# Altium PCB Minna_V01.PcbDoc (part 2 of 2)
Units mil, origin at the board's own origin, x right, y up, seen from the top; angles counter-clockwise.
Board outline 3650 x 2200 mil, 4 copper layers (Top Layer, Power Plane, Ground Plane, Bottom Layer), stack 61.6 mil thick; 103 components, 111 nets, 595 pads, 332 vias.
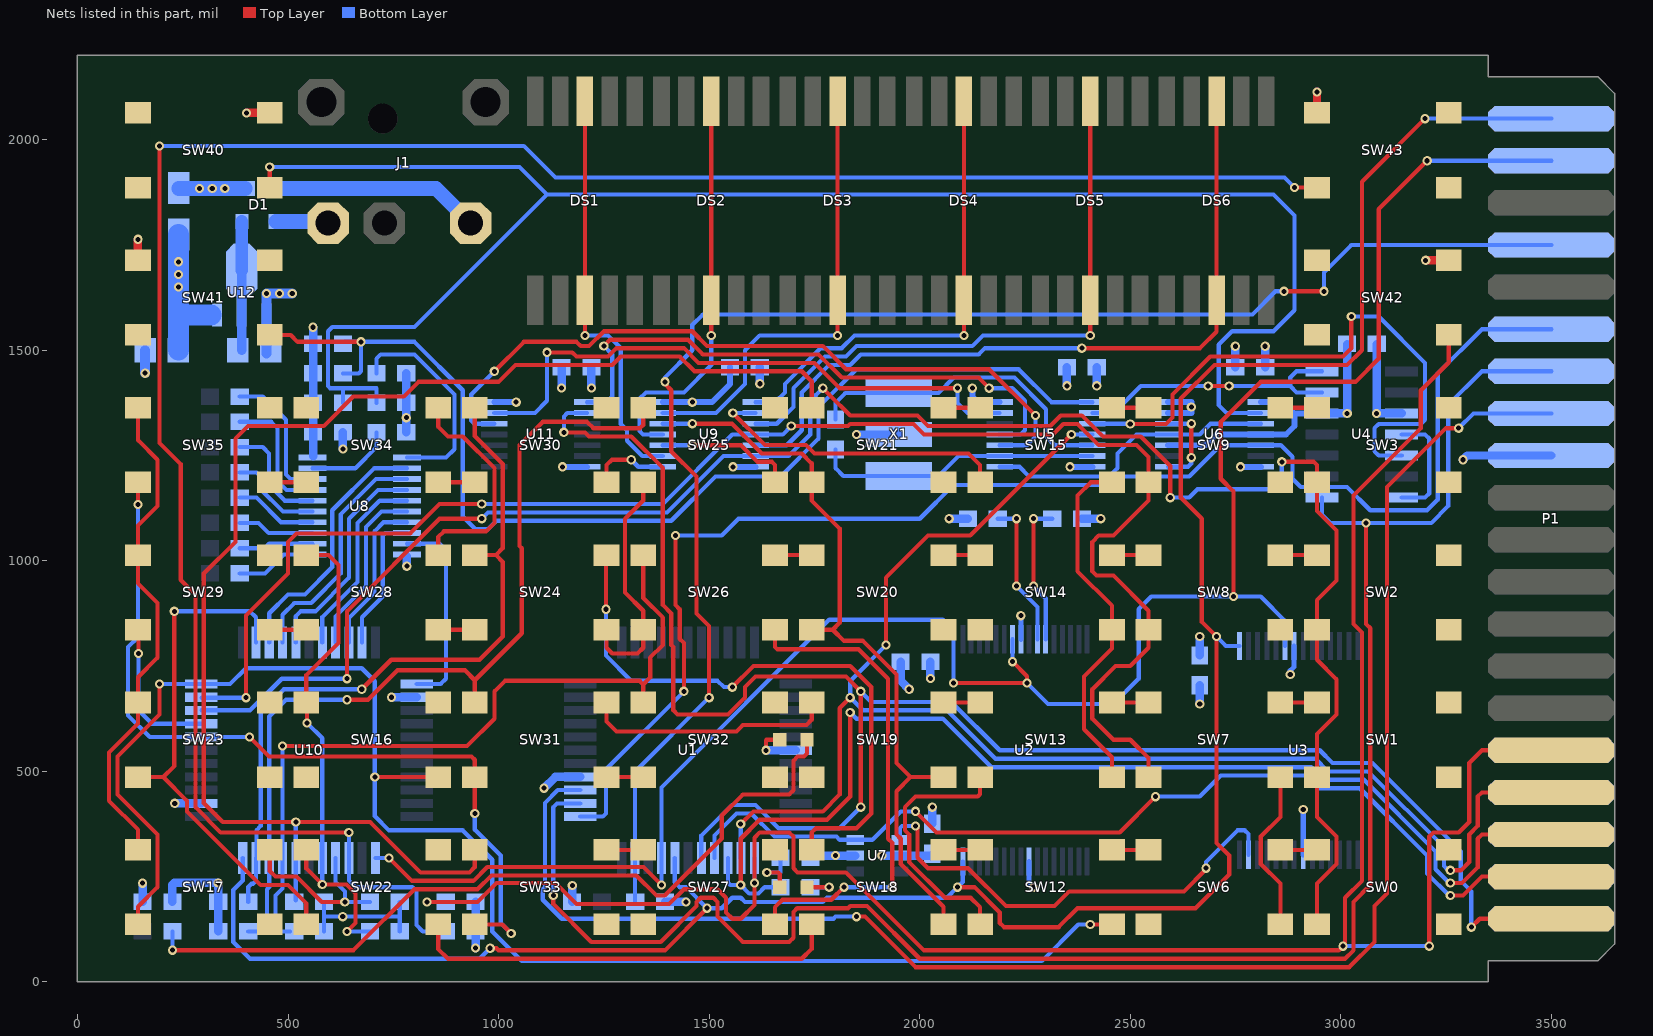
[diagram p4: the nets of this part, all layers, seen from the top]

## Via types
v1: diameter 22, hole 12, Top Layer to Bottom Layer, 332 vias

## Nets (pads, with @x,y where several pads share a name; then routed paths per layer and width w, separated by ;. In a path a pad name is that pad's centre, name@x,y a point inside that pad or via, vN(x,y) a via of type N, cw(c..) or ccw(c..) an arc to the next point about the centre after c; other vN are vias at no path point) (continued)
GND: C1.1 C2.1 C3.1 C4.1 C5.1 C6.1 C7.1 C8.1 C9.1 C10.1 C11.1 C21.1 C22.2 C23.2 C24.2 D1.1 P1.32 R6.1 R7.1 R25.2 R26.2 SW40.1 SW40.2 SW41.1 SW41.2 SW42.1 SW42.2 SW43.1 SW43.2 U1.26 U2.24 U3.21 U4.10 U5.7 U6.7 U7.2 U8.10 U9.7 U10.2 U11.7 U12.1 X1.2 | length 2615.3
  Top Layer w20: SW41.1@143.5,1713.58 v1(143.5,1763.5) ; v1(401.42,2063.58) SW40.2@456.5,2063.58 ; SW43.1@2943.5,2063.58 v1(2943.5,2113.5) ; v1(3201.42,1713.58) SW42.2@3256.5,1713.58
  Bottom Layer w12: U2.24@2259.84,286.22 2259.84,235.16 v1(2270,225) ; U3.21@2910.83,301.97 v1(2910.83,409.17)
  Bottom Layer w14: v1(1151.77,1223.23) U11.7@1210.24,1223.23 ; U9.7@1389.76,1376.77 v1(1460,1376.77) 1506.77,1376.77 1549.57,1419.57 C9.1@1549.57,1460 ; v1(2356.77,1223.23) U5.7@2410.24,1223.23 ; v1(2761.77,1223.23) U6.7@2810.24,1223.23
  Bottom Layer w20: C10.1@154.57,190 v1(154.57,234.57) ; v1(230.98,424.02) U10.2@294.09,424.02 ; v1(630.43,1265.43) C8.1@630.43,1305 ; R26.2@780.87,1305 C21.1@780.87,1375 R25.2@780.87,1445 ; v1(782.2,987.2) U8.10@782.2,1011 ; v1(1108,460) 1135.01,487.01 U1.26@1194.09,487.01 ; v1(1220.43,1410.43) C11.1@1220.43,1460 ; C1.1@1745.43,300 v1(1800,300) U7.2@1846.85,300 ; v1(1850,1300) X1.2@1950,1300 ; C2.1@1954.57,760 1954.57,715.43 v1(1975,695) ; C7.1@2030,375.43 v1(2030,415) ; v1(2070,1100) R7.1@2114.57,1100 ; R6.1@2385.43,1100 v1(2430,1100) ; v1(2420.43,1415.43) C5.1@2420.43,1460 ; v1(2665,660) C3.1@2665,704.57 ; C6.1@2749.57,1460 v1(2749.57,1509.57) ; C4.1@3085,1514.57 v1(3085,1350) U4.10@3144.49,1350 ; v1(3290,1240) 3300,1250 P1.32@3500,1250
  Bottom Layer w23.5: v1(160.63,1445.63) C23.2@160.63,1500 ; C22.2@449.05,1492.13 U12.1@449.05,1583.7 v1(449.05,1635) v1(480,1635) v1(510,1635)
  Bottom Layer w35: C24.2@240.75,1884.37 v1(290,1884.37) v1(320,1884.37) v1(350,1884.37) D1.1@398.5,1884.37
  other v1: 780.87,1340
H\A\L\T\: P1.18 R2.2 U1.14 | length 2757
  Top Layer w10: v1(1575,230) 1575,340 1620,385 1780,385 1835,440 v1(1835,640) ; v1(3260,235) 3288,235 3325,272 3325,340 3335,350 P1.18@3500,350
  Bottom Layer w10: U1.14@1544.49,294.09 1544.49,235.51 1550,230 v1(1575,230) 1595,210 1617,210 1632,225 R2.2@1669.57,225 ; v1(1835,640) 1850,625 2055,625 2170,510 2930,510 2960,480 3055,480 3225,310 3225,267.47 3257.47,235 v1(3260,235)
I\N\T\: P1.16 R9.1 SW42.3 SW42.4 U1.12 | length 5218.8
  Top Layer w10: v1(830,190) 950,190 995,235 1135,235 1185,185 1405,185 1440,220 1520,220 1540,200 1540,165 1555,150 1575,150 1607.48,182.48 v1(1607.48,235) 1607.48,342.48 1620,355 1690,355 1700,345 1700,270 1710,260 1825,260 2010,75 2995,75 v1(3005,85) 3010,90 3010,200 3050,240 3050,830 3030,850 3030,1155 3190,1315 3190,1405 3256.5,1471.5 SW42.4@3256.5,1536.42 ; v1(3210,85) 3210,345 3220,355 3280,355 3305,380 3305,520 3335,550 P1.16@3500,550
  Bottom Layer w10: v1(830,190) R9.1@874.57,190 ; v1(1607.48,235) U1.12@1607.48,294.09 ; v1(3005,85) v1(3210,85)
I\O\R\Q\: P1.20 U1.16 U11.2 | length 4219.2
  Top Layer w10: v1(1155,1305) 1205,1305 1215,1295 1315,1295 1390,1220 1390,895 1410,875 1410,800 1415,795 1415,645 1425,635 1545,635 1585,675 1585,700 1610,725 1825,725 v1(1860,690) v1(1860,415) ; v1(3310,130) 3330,150 P1.20@3500,150
  Bottom Layer w10: v1(1155,1305) 1155,1343 1163.18,1351.18 U11.2@1210.24,1351.18 ; U1.16@1481.5,294.09 1481.5,347.5 1554,420 1610,420 1665,365 1810,365 v1(1860,415) ; v1(1860,690) 1885,665 2075,665 2190,550 2950,550 2980,520 3075,520 3285,310 3285,240 3310,215 v1(3310,130)
M\1\: P1.34 U1.24 U4.1 | length 4397.9
  Top Layer w10: v1(1130,205) 1130,185 1220,95 1385,95 1470,180 1470,190 1480,200 1510,200 1520,190 1520,155 1580,95 1690,95 1700,105 1700,165.99 1709.01,175 1830,175 1835,180 1875,180 2000,55 3010,55 3030,75 3030,190 3070,230 3070,840 3060,850 v1(3060,1090)
  Bottom Layer w10: v1(1130,205) 1130,415 1139.02,424.02 U1.24@1194.09,424.02 ; U4.1@2955.51,1150 2955.51,1109.49 2975,1090 v1(3060,1090) 3215,1090 3255,1130 3255,1370 3335,1450 P1.34@3500,1450
M\R\E\Q\: P1.19 U1.15 U7.3 | length 2354.6
  Top Layer w10: v1(1990,405) 2040,355 2475,355 v1(2560,440) ; v1(3260,205) 3290,205 3335,250 P1.19@3500,250
  Bottom Layer w10: U1.15@1512.99,294.09 1512.99,347.99 1565,400 1600,400 1655,345 1802.4,345 1810,337.4 U7.3@1846.85,337.4 1887.4,337.4 1955,405 v1(1990,405) ; v1(2560,440) 2665,440 2715,490 2920,490 2950,460 3045,460 3205,300 3205,257.47 3257.47,205 v1(3260,205)
NetC20_1: C20.1 R1.1 SW41.3 SW41.4 U5.1 | length 2703.5
  Top Layer w10: SW41.4@456.5,1536.42 506.42,1536.42 522.84,1520 v1@670,1520
  Bottom Layer w10: R1.1@630.43,1445 668,1445 673,1450 v1(673,1520) ; C20.1@635.43,1520 v1(673,1520) ; U5.1@2410.24,1376.77 2313.23,1376.77 2235,1455 1850,1455 1760,1365 1760,1290 1670,1200 1515,1200 1410,1095 995,1095 975,1075 945,1075 915,1105 915,1405 800,1520 v1(673,1520)
NetC21_2: C21.2 R3.1 SW40.3 SW40.4 U6.2 | length 4191
  Top Layer w10: SW40.4@456.5,1886.42 v1(456.5,1935)
  Bottom Layer w10: v1(456.5,1935) 1050,1935 1115,1870 ; R3.1@630.43,1375 630.43,1409.57 ; C21.2@710,1375 710,1410 600,1410 595,1415 595,1545 605,1555 800,1555 1115,1870 ; U6.2@2810.24,1351.18 2728.82,1351.18 2710,1370 2710,1513 2742,1545 2840,1545 2890,1595 2890,1820 2840,1870 1115,1870
NetC22_1: C22.1 D1.4 U12.2 | length 305.6
  Bottom Layer w23.5: C22.1@390,1500 U12.2@390,1591.57 U12.2@390,1690
  Bottom Layer w30: U12.2@390,1690 D1.4@390,1805.63
NetD1_2: D1.2 J1.2 | length 496.3
  Bottom Layer w35: D1.2@471.5,1884.37 851.26,1884.37 J1.2@933.66,1801.97
NetD1_3: D1.3 J1.1 | length 119.9
  Bottom Layer w35: D1.3@471.5,1805.63 J1.1@591.42,1805.63
NetD2_2: D2.2 R2.1 | length 97.1
  Top Layer w10: D2.2@1732.48,225 v1(1785,225)
  Bottom Layer w10: R2.1@1740.43,225 v1(1785,225)
NetD3_2: D3.2 R27.2 | length 1890.3
  Top Layer w10: v1(225.43,75.43) 655.43,75.43 800,220 950,220 983,253 1327,253 1375,205 1394.53,205 1530,340.47 1530,395 1580,445 1690,445 1700,455 1700,525 1710,535 1725,535 1732.48,542.48 D3.2@1732.48,575
  Bottom Layer w10: v1(225.43,75.43) R27.2@225.43,120
NetDS1_3: DS1.3 DS1.8 U9.2 | length 979.6
  Top Layer w10: v1(1205,1535) DS1.3@1205,1618.78 DS1.8@1205,2091.22
  Bottom Layer w10: v1(1205,1535) 1260,1535 1290,1505 1290,1325 1305,1310 1305,1285 1341.18,1248.82 U9.2@1389.76,1248.82
NetDS2_3: DS2.3 DS2.8 U9.4 | length 964.4
  Top Layer w10: v1(1505,1535) DS2.3@1505,1618.78 DS2.8@1505,2091.22
  Bottom Layer w10: U9.4@1389.76,1300 1343,1300 1335,1308 1335,1385 1350,1400 1440,1400 1505,1465 v1(1505,1535)
NetDS3_3: DS3.3 DS3.8 U9.6 | length 1094.5
  Top Layer w10: v1(1805,1535) DS3.3@1805,1618.78 DS3.8@1805,2091.22
  Bottom Layer w10: U9.6@1389.76,1351.18 1516.18,1351.18 1585,1420 1585,1500 1620,1535 v1(1805,1535)
NetDS4_3: DS4.3 DS4.8 U9.8 | length 1128.2
  Top Layer w10: v1(2105,1535) DS4.3@2105,1618.78 DS4.8@2105,2091.22
  Bottom Layer w10: U9.8@1610.24,1376.77 1656.77,1376.77 1680,1400 1680,1420 1765,1505 1815,1505 1845,1535 v1(2105,1535)
NetDS5_3: DS5.3 DS5.8 U9.10 | length 1464.1
  Top Layer w10: v1(2405,1535) DS5.3@2405,1618.78 DS5.8@2405,2091.22
  Bottom Layer w10: U9.10@1610.24,1325.59 1660.59,1325.59 1700,1365 1700,1410 1775,1485 1825,1485 1850,1510 2125,1510 2150,1535 v1(2405,1535)
NetDS6_3: DS6.3 DS6.8 U9.12 | length 1806.3
  Top Layer w10: v1(2385,1505) 2665.96,1505 2705,1544.04 DS6.3@2705,1618.78 DS6.8@2705,2091.22
  Bottom Layer w10: U9.12@1610.24,1274.41 1684.41,1274.41 1720,1310 1720,1400 1785,1465 1835,1465 1860,1490 2140,1490 2155,1505 v1(2385,1505)
NetR6_2: R6.2 U2.11 | length 342.9
  Top Layer w10: v1(2270,940) v1(2270,1100)
  Bottom Layer w10: v1(2270,940) 2299.21,910.79 U2.11@2299.21,813.78 ; v1(2270,1100) R6.2@2314.57,1100
NetR7_2: R7.2 U2.10 | length 351.3
  Top Layer w10: v1(2230,940) v1(2230,1100)
  Bottom Layer w10: R7.2@2185.43,1100 v1(2230,1100) ; v1(2230,940) 2279.53,890.47 U2.10@2279.53,813.78
NetR8_1: R8.1 U5.5 X1.3 | length 779.2
  Bottom Layer w10: R8.1@1800,1335.43 1800,1375 1823.43,1398.43 X1.3@1950,1398.43 2044.43,1398.43 2081,1435 2225,1435 2300,1360 2300,1295 2320.59,1274.41 U5.5@2410.24,1274.41
NetR8_2: R8.2 U5.6 U5.9 X1.1 | length 682
  Bottom Layer w10: R8.2@1800,1264.57 1800,1220 1818.43,1201.57 X1.1@1950,1201.57 2044.57,1201.57 2091.82,1248.82 U5.9@2189.76,1248.82 U5.6@2410.24,1248.82
NetR11_1: R11.1 U8.18 | length 329.7
  Bottom Layer w10: R11.1@385.43,1390 440,1390 495,1335 495,1205 506.02,1193.98 U8.18@557.8,1193.98
NetR12_1: R12.1 U8.17 | length 312.5
  Bottom Layer w10: R12.1@385.43,1330 460,1330 475,1315 475,1190 496.61,1168.39 U8.17@557.8,1168.39
NetR13_1: R13.1 U8.16 | length 269
  Bottom Layer w10: R13.1@385.43,1270 440,1270 455,1255 455,1180 492.2,1142.8 U8.16@557.8,1142.8
NetR14_1: R14.1 U8.15 | length 228.4
  Bottom Layer w10: R14.1@385.43,1210 425,1210 435,1200 435,1170 487.8,1117.2 U8.15@557.8,1117.2
NetR15_1: R15.1 U8.14 | length 196.5
  Bottom Layer w10: R15.1@385.43,1150 425,1150 483.39,1091.61 U8.14@557.8,1091.61
NetR16_1: R16.1 U8.13 | length 182.3
  Bottom Layer w10: R16.1@385.43,1090 430,1090 453.98,1066.02 U8.13@557.8,1066.02
NetR17_1: R17.1 U8.12 | length 176.7
  Bottom Layer w10: R17.1@385.43,1030 445,1030 455.43,1040.43 U8.12@557.8,1040.43
NetR18_1: R18.1 U8.11 | length 190.9
  Bottom Layer w10: R18.1@385.43,970 445,970 489.84,1014.84 U8.11@557.8,1014.84
NetR25_1: R25.1 U8.1 | length 514.5
  Bottom Layer w10: R25.1@710,1445 710,1480 720,1490 800,1490 895,1395 895,1265 875.16,1245.16 U8.1@782.2,1245.16
NetR26_1: R26.1 U8.19 | length 208.1
  Bottom Layer w10: U8.19@557.8,1219.57 659.57,1219.57 710,1270 R26.1@710,1305
NetU4_6: U4.6 U4.7 U5.2 | length 679.6
  Top Layer w10: v1(2685,1415) v1(2735,1415)
  Bottom Layer w10: U5.2@2410.24,1351.18 2461.18,1351.18 2525,1415 v1(2685,1415) ; v1(2735,1415) 2880,1415 ; U4.6@2955.51,1400 2895,1400 2880,1415 ; U4.7@2955.51,1450 2895,1450 2880,1435 2880,1415
NetU4_11: U4.11 U4.14 | length 269.3
  Bottom Layer w10: U4.14@3144.49,1150 3200,1150 3210,1160 3210,1290 3200,1300 U4.11@3144.49,1300
NetU4_12: U4.12 U5.3 | length 1404.3
  Top Layer w10: v1(2500,1325) 2585,1325 2600,1340 2600,1395 2690,1485 3005,1485 3025,1505 v1(3025,1580)
  Bottom Layer w10: U5.3@2410.24,1325.59 2499.41,1325.59 v1(2500,1325) ; v1(3025,1580) 3090,1580 3200,1470 3200,1335 3190,1325 3090,1325 3080,1315 3080,1260 3090,1250 U4.12@3144.49,1250
NetU5_8: U5.8 U6.3 U6.11 | length 702.6
  Bottom Layer w10: U5.8@2189.76,1223.23 2236.77,1223.23 2260,1200 2450,1200 2470,1220 2470,1255 2515,1300 U6.11@2589.76,1300 2665,1300 2690.59,1325.59 U6.3@2810.24,1325.59
NetU5_10: U5.10 U11.12 | length 1756.9
  Top Layer w10: v1(990,1450) 1060,1520 1185,1520 1195,1510 1215,1510 1250,1545 1460,1545 1495,1510 1770,1510 1825,1455 2165,1455 v1(2275,1345)
  Bottom Layer w10: U11.12@989.76,1325.59 942.41,1325.59 935,1333 935,1395 v1(990,1450) ; U5.10@2189.76,1274.41 2254.41,1274.41 2275,1295 v1(2275,1345)
NetU5_11: U5.11 U11.1 | length 1394.2
  Top Layer w10: v1(1250,1510) 1265,1525 1450,1525 1485,1490 1760,1490 1815,1435 2140,1435 v1(2165,1410)
  Bottom Layer w10: U11.1@1210.24,1376.77 1256.77,1376.77 1270,1390 1270,1490 v1(1250,1510) ; v1(2165,1410) 2220,1410 2250,1380 2250,1310 2240,1300 U5.11@2189.76,1300
NetU5_13: U5.13 U11.13 | length 1423.6
  Top Layer w10: v1(1115,1495) 1175,1495 1185,1485 1260,1485 1280,1505 1440,1505 1475,1470 1750,1470 1810,1410 v1(2090,1410)
  Bottom Layer w10: U11.13@989.76,1351.18 1086.18,1351.18 1115,1380 v1(1115,1495) ; v1(2090,1410) 2090,1375 2113.82,1351.18 U5.13@2189.76,1351.18
NetU6_8: U6.8 U6.12 | length 208.9
  Top Layer w10: v1(2645,1245) v1(2645,1325.59)
  Bottom Layer w10: U6.8@2589.76,1223.23 2637.23,1223.23 2645,1231 v1(2645,1245) ; U6.12@2590.35,1325.59 U6.12@2589.76,1325.59 v1(2645,1325.59)
NetU8_2: U8.2 U10.14 | length 617.9
  Bottom Layer w10: U10.14@455.51,805.91 455.51,875.51 500,920 540,920 605,985 605,1120 704.57,1219.57 U8.2@782.2,1219.57
NetU8_3: U8.3 U10.15 | length 576.7
  Bottom Layer w10: U10.15@487.01,805.91 487.01,872.01 515,900 555,900 625,970 625,1110 708.98,1193.98 U8.3@782.2,1193.98
NetU8_4: U8.4 U10.16 | length 532.5
  Bottom Layer w10: U10.16@518.5,805.91 518.5,868.5 530,880 565,880 645,960 645,1100 713.39,1168.39 U8.4@782.2,1168.39
NetU8_5: U8.5 U10.18 | length 457.8
  Bottom Layer w10: U10.18@581.5,805.91 581.5,866.5 665,950 665,1090 717.8,1142.8 U8.5@782.2,1142.8
NetU8_6: U8.6 U10.19 | length 416.5
  Bottom Layer w10: U10.19@612.99,805.91 612.99,867.99 685,940 685,1080 722.2,1117.2 U8.6@782.2,1117.2
NetU8_7: U8.7 U10.20 | length 375.3
  Bottom Layer w10: U10.20@644.49,805.91 644.49,864.49 705,925 705,1070 726.61,1091.61 U8.7@782.2,1091.61
NetU8_8: U8.8 U10.21 | length 334.1
  Bottom Layer w10: U10.21@675.98,805.91 675.98,865.98 725,915 725,1060 731.02,1066.02 U8.8@782.2,1066.02
NetU8_9: U8.9 U10.23 | length 478.5
  Bottom Layer w10: U8.9@782.2,1040.43 859.57,1040.43 875,1025 875,720 862.48,707.48 U10.23@805.91,707.48
NMI: P1.17 U1.13 U5.4 | length 3552.4
  Top Layer w10: v1(1575,375) 1605,405 1770,405 1810,445 1810,650 v1(1835,675) ; v1(1920,800) 1920,960 2020,1060 2120,1060 v1(2360,1300) ; v1(3260,265) 3285,265 3305,285 3305,350 3325,370 3325,440 3335,450 P1.17@3500,450
  Bottom Layer w10: U1.13@1575,295.08 v1(1575,375) ; v1(1920,800) 1835,715 v1(1835,675) 1865,645 2065,645 2180,530 2940,530 2970,500 3065,500 3245,320 3245,275 3255,265 v1(3260,265) ; v1(2360,1300) U5.4@2410.24,1300
PA0: R19.1 SW0.1 SW0.2 SW6.1 SW6.2 SW12.1 SW12.2 SW18.1 SW18.2 SW24.1 SW24.2 SW30.1 SW30.2 U10.43 | length 3452.3
  Top Layer w10: v1(675,695) 745,765 955,765 1010,820 1010,997.16 993.58,1013.58 ; SW24.1@943.5,1013.58 993.58,1013.58 ; SW30.1@943.5,1363.58 943.5,1296.5 1010,1230 1010,1030 993.58,1013.58 ; v1(1255,885) 1255,1013.58 SW24.2@1255,1015 ; v1(1555,700) 1605,750 1835,750 1885,700 1885,400 1850,365 1754,365 1743.5,354.5 SW18.1@1743.5,313.58 ; SW18.2@2056.5,313.58 SW12.1@2143.5,313.58 ; SW12.2@2456.5,313.58 SW6.1@2543.5,313.58 ; SW6.2@2856.5,313.58 SW0.1@2943.5,313.58
  Bottom Layer w10: R19.1@405.43,190 405.43,225.43 413,233 417,233 424.02,240.02 U10.43@424.02,294.09 ; U10.43@425,295.08 425,360 435,370 435,640 490,695 v1(675,695) ; v1(1255,885) 1255,775 1315,715 1520,715 1535,700 v1(1555,700)
PA1: R20.1 SW1.1 SW1.2 SW7.1 SW7.2 SW13.1 SW13.2 SW19.1 SW19.2 SW25.1 SW25.2 SW31.1 SW31.2 U10.42 | length 2978
  Top Layer w10: v1(640,670) 690,670 760,740 920,740 943.5,716.5 ; SW31.1@943.5,663.58 943.5,716.5 ; SW31.2@1256.5,663.58 1256.5,618.5 1280,595 1565,595 1580,610 1731,610 1743.5,622.5 SW19.1@1743.5,663.58 ; SW25.1@1343.5,1363.58 1343.5,1322.5 1336,1315 1225,1315 1210,1330 1105,1330 1050,1275 1050,1035 1055,1030 1055,827.99 943.5,716.5 ; SW19.2@2056.5,663.58 SW13.1@2143.5,663.58 ; SW13.2@2456.5,663.58 SW7.1@2543.5,663.58 ; SW7.2@2856.5,663.58 SW1.1@2943.5,663.58
  Bottom Layer w10: R20.1@405.43,120 443,120 450,127 450,220 455.51,225.51 U10.42@455.51,294.09 455.51,630.51 495,670 v1(640,670)
PA2: R21.1 SW2.1 SW2.2 SW8.1 SW8.2 SW14.1 SW14.2 SW20.1 SW20.2 SW26.1 SW26.2 SW32.1 SW32.2 U10.41 | length 2176.4
  Top Layer w10: v1(487.01,560) 925,560 990,625 990,690 1015,715 1335,715 1343.5,706.5 ; SW32.1@1343.5,663.58 1343.5,706.5 ; SW26.1@1343.5,1013.58 1343.5,911.5 1390,865 1390,800 1360,770 1360,722.99 1343.5,706.5 ; SW26.2@1656.5,1013.58 SW20.1@1743.5,1013.58 ; SW20.2@2056.5,1013.58 SW14.1@2143.5,1013.58 ; SW14.2@2456.5,1013.58 SW8.1@2543.5,1013.58 ; SW8.2@2856.5,1013.58 SW2.1@2943.5,1013.58
  Bottom Layer w10: v1(487.01,560) U10.41@487.01,294.09 487.01,222.01 470,205 470,127 477,120 R21.1@504.57,120
PA3: R22.1 SW3.1 SW3.2 SW9.1 SW9.2 SW15.1 SW15.2 SW21.1 SW21.2 SW27.1 SW27.2 SW33.1 SW33.2 U10.40 | length 3724.7
  Top Layer w10: SW33.1@943.5,313.58 943.5,272.5 931,260 815,260 695,380 v1(518.5,380) 345,380 300,425 300,970 375,1045 375,1290 405,1320 585,1320 655,1390 775,1390 810,1425 1000,1425 1040,1465 1270,1465 1290,1485 1430,1485 1465,1450 1720,1450 1743.5,1426.5 SW21.1@1743.5,1363.58 ; SW33.2@1256.5,313.58 SW27.1@1343.5,313.58 ; SW21.2@2056.5,1363.58 SW15.1@2143.5,1363.58 ; SW15.2@2456.5,1363.58 SW9.1@2543.5,1363.58 ; SW9.2@2856.5,1363.58 SW3.1@2943.5,1363.58
  Bottom Layer w10: R22.1@518.5,193.94 U10.40@518.5,294.09 v1(518.5,380)
PA4: R23.1 SW16.1 SW16.2 SW22.1 SW22.2 SW28.1 SW28.2 SW34.1 SW34.2 U10.38 | length 1770.8
  Top Layer w10: SW22.1@543.5,313.58 543.5,269.49 v1(581.5,231.5) ; SW16.1@543.5,663.58 543.5,728.5 620,805 620,990 596.42,1013.58 SW28.1@543.5,1013.58 ; v1(545,615) SW16.1@545,662.09 ; v1@578.5,231.5 v1(581.5,231.5) ; v1(640,120) 660,140 660,210 638.5,231.5 v1(581.5,231.5) ; SW28.2@856.5,1013.58 856.5,1056.5 870,1070 970,1070 990,1090 990,1220 915,1295 880,1295 856.5,1318.5 SW34.2@856.5,1363.58
  Bottom Layer w10: v1(545,615) 581.5,578.5 U10.38@581.5,294.09 v1(581.5,231.5) ; v1(640,120) R23.1@694.57,120
PA5: R24.1 SW17.1 SW17.2 SW23.1 SW23.2 SW29.1 SW29.2 SW35.1 SW35.2 U10.37 | length 1615.6
  Top Layer w10: SW17.1@143.5,313.58 143.5,361.5 75,430 75,545 143.5,613.5 SW23.1@143.5,663.58 143.5,723.5 190,770 190,900 143.5,946.5 SW29.1@143.5,1013.58 143.5,1083.5 190,1130 190,1240 143.5,1286.5 SW35.1@143.5,1363.58 ; SW17.2@456.5,313.58 456.5,263.5 470,250 520,250 580,190 v1(635,190)
  Bottom Layer w10: U10.37@612.99,294.09 612.99,237.01 635,215 v1(635,190) R24.1@694.57,190
PC0: SW0.3 SW0.4 SW1.3 SW1.4 SW2.3 SW2.4 SW3.3 SW3.4 U9.13 U10.9 | length 4556
  Top Layer w10: v1(640,720) 640,880 860,1100 v1(960,1100) ; v1(1770,1410) 1770.16,1410 1786.02,1394.14 1786.02,1393.98 1835,1345 1995,1345 2020,1320 2310,1320 2335,1345 2385,1345 2435,1295 2525,1295 2595,1225 v1(2595,1150) ; v1(2860,1235) 2936,1235 2943.5,1227.5 SW3.3@2943.5,1186.42 2943.5,1118.5 2990,1072.01 2990,952.99 2943.5,906.5 SW2.3@2943.5,836.42 2943.5,765 2990,718.5 2990,635 2943.5,588.5 SW1.3@2943.5,486.42 2943.5,391.5 2990,345 2990,280 2943.5,233.5 SW0.3@2943.5,136.42
  Bottom Layer w10: U10.9@294.61,645 410,645 485,720 v1(640,720) ; v1(960,1100) 975,1115 1400,1115 1533.82,1248.82 U9.13@1610.24,1248.82 1688.82,1248.82 1740,1300 1740,1380 v1(1770,1410) ; v1(2595,1150) 2640,1150 2660,1170 2850,1170 2860,1180 v1(2860,1235)
PC1: SW6.3 SW6.4 SW7.3 SW7.4 SW8.3 SW8.4 SW9.3 SW9.4 U9.11 U10.10 | length 4186.7
  Top Layer w10: v1(400,675) 400,870 500,970 500,1045 520,1065 790,1065 860,1135 v1(960,1135) ; v1(1695,1320) 1830,1320 1835,1325 1985,1325 2010,1300 2315.96,1300 2340.96,1325 2375,1325 2425,1275 2515,1275 2543.5,1246.5 SW9.3@2543.5,1186.42 2543.5,1143.5 2460,1060 2425,1060 2410,1045 2410,975 2420,965 2460,965 2543.5,881.5 SW8.3@2543.5,836.42 2543.5,793.5 2500,750 2465,750 2410,695 2410,625 2460,575 2500,575 2543.5,531.5 SW7.3@2543.5,486.42 ; SW6.4@2856.5,136.42 2856.5,233.5 2810,280 2810,345 2856.5,391.5 SW7.4@2856.5,486.42
  Bottom Layer w10: U10.10@295.08,675 v1(400,675) ; v1(960,1135) 1390,1135 1555,1300 U9.11@1610.24,1300 1675,1300 v1(1695,1320)
PC2: SW12.3 SW12.4 SW13.3 SW13.4 SW14.3 SW14.4 SW15.3 SW15.4 SW16.3 SW16.4 SW17.3 SW17.4 U9.9 U10.11 | length 5916.4
  Top Layer w10: SW17.3@143.5,136.42 143.5,178.5 190,225 190,350 95,445 95,535 195,635 v1(195,707.48) ; v1(706,486.42) SW16.4@856.5,486.42 ; v1(1556.18,1351.18) 1632.36,1275 1730,1275 1750,1255 2116,1255 2143.5,1227.5 SW15.3@2143.5,1186.42 ; v1@1560,1350 v1@1560,1351.18 ; SW12.3@2143.5,136.42 2143.5,177.5 2121,200 2060,200 1975,285 1975,350 1965,360 1965,415 1990,440 2138,440 2143.5,445.5 SW13.3@2143.5,486.42 ; v1(2405,136.42) SW12.4@2456.5,136.42 ; SW13.4@2456.5,486.42 2456.5,533.5 2390,600 2390,725 2456.5,791.5 SW14.4@2456.5,836.42 2456.5,893.5 2375,975 2375,1155 2406.42,1186.42 SW15.4@2456.5,1186.42
  Bottom Layer w10: v1(195,707.48) U10.11@294.09,707.48 362.48,707.48 400,745 675,745 706,714 v1(706,486.42) 706,394 740,360 915,360 985,290 985,120 1055,50 2290,50 2376.42,136.42 v1(2405,136.42) ; v1(1556.18,1351.18) U9.9@1610.24,1351.18
PC3: SW18.3 SW18.4 SW19.3 SW19.4 SW20.3 SW20.4 SW21.3 SW21.4 SW22.3 SW22.4 SW23.3 SW23.4 U9.5 U10.13 | length 4088.9
  Top Layer w10: SW23.3@143.5,486.42 203.58,486.42 ; v1(230,880) 230,512.84 203.58,486.42 ; SW22.3@543.5,136.42 543.5,186.5 500,230 435,230 260,405 260,430 203.58,486.42 ; SW22.4@856.5,136.42 856.5,78.5 880,55 1720,55 1743.5,78.5 SW18.3@1743.5,136.42 ; v1(1460,1325.59) 1554.41,1325.59 1625,1255 1720,1255 1743.5,1231.5 SW21.3@1743.5,1186.42 1743.5,1143.5 1810,1077.01 1810,852.84 1793.58,836.42 ; SW20.3@1743.5,836.42 1793.58,836.42 ; SW18.4@2056.5,136.42 2056.5,178.5 1955,280 1955,340 1945,350 1945,452.84 1978.58,486.42 ; SW19.4@2056.5,486.42 1978.58,486.42 ; 1793.58,836.42 1820,810 1865,810 1945,730 1945,520 1978.58,486.42
  Bottom Layer w10: v1(230,880) 410,880 424.02,865.98 U10.13@424.02,805.91 ; U9.5@1389.76,1325.59 v1(1460,1325.59)
PC4: SW24.3 SW24.4 SW25.3 SW25.4 SW26.3 SW26.4 SW27.3 SW27.4 SW28.3 SW28.4 SW29.3 SW29.4 U9.3 U10.8 | length 2602.7
  Top Layer w10: v1(145,780) SW29.3@145,834.92 ; SW29.4@456.5,836.42 SW28.3@543.5,836.42 ; SW28.4@856.5,836.42 SW24.3@943.5,836.42 ; SW24.4@1256.5,836.42 1256.5,793.5 1270,780 1330,780 1343.5,793.5 SW26.3@1343.5,836.42 1343.5,881.5 1300,925 1300,1100 1343.5,1143.5 SW25.3@1343.5,1186.42 ; v1(1460,1274.41) 1575.59,1274.41 1615,1235 1649,1235 1656.5,1227.5 SW25.4@1656.5,1186.42 ; SW27.4@1656.5,136.42 1656.5,177.5 1674,195 1790,195 v1(1820,225) ; SW26.4@1656.5,836.42 1656.5,795.5 1662,790 1855,790 1925,720 1925,340 1935,330 v1(1935,225)
  Bottom Layer w10: v1(145,780) 145,645 177.01,612.99 U10.8@294.09,612.99 ; U9.3@1389.76,1274.41 v1(1460,1274.41) ; v1(1820,225) v1(1935,225)
PC5: SW30.3 SW30.4 SW31.3 SW31.4 SW32.3 SW32.4 SW33.3 SW33.4 SW34.3 SW34.4 SW35.3 SW35.4 U9.1 U10.7 | length 2421.6
  Top Layer w10: v1(143.5,1133.5) SW35.3@143.5,1186.42 ; v1(408.5,581.5) 455,535 936,535 943.5,527.5 SW31.3@943.5,486.42 v1(943.5,400) ; SW35.4@456.5,1186.42 SW34.3@543.5,1186.42 ; SW34.4@856.5,1186.42 SW30.3@943.5,1186.42 ; SW33.3@943.5,136.42 1008.58,136.42 v1(1030,115) ; SW31.4@1256.5,486.42 SW32.3@1343.5,486.42 ; SW30.4@1256.5,1186.42 1256.5,1227.5 1269,1240 v1(1315,1240)
  Bottom Layer w10: v1(143.5,1133.5) 143.5,818.5 120,795 120,632.99 171.5,581.5 U10.7@294.09,581.5 v1(408.5,581.5) ; v1(943.5,400) 943.5,361.5 1005,300 1005,140 v1(1030,115) ; v1(1315,1240) 1331.77,1223.23 U9.1@1389.76,1223.23
R\D\: P1.40 U1.18 U2.32 U3.1 U10.44 | length 5635.3
  Top Layer w10: v1(980,80) 995,80 1000,75 1395,75 v1(1495,175) ; v1(2090,225) 2130,225 2190,165 2190,140 2200,130 2330,130 2375,175 2655,175 2735,255 2735,300 2705,330 v1(2705,820) 2670,855 2670,1100 2620,1150 2620,1385 2700,1465 3015,1465 3050,1500 3050,1900 v1(3200,2050)
  Bottom Layer w10: U10.44@392.52,294.09 392.52,240.52 370,218 370,95 410,55 955,55 v1(980,80) ; U1.18@1418.5,294.09 1418.5,236.5 1430,225 1445,225 v1(1495,175) 1530,175 1555,200 1575,200 1585,190 1770,190 1780,200 2065,200 v1(2090,225) 2102.36,237.36 U2.32@2102.36,286.22 ; v1(2705,820) 2726.97,798.03 U3.1@2759.25,798.03 ; v1(3200,2050) P1.40@3500,2050
R\F\S\H\: P1.33 U1.25 | length 3954
  Top Layer w10: v1(1850,155) 1870,155 1990,35 3020,35 3080,95 3080,180 3110,210 3110,1175 3250,1315 v1(3280,1315)
  Bottom Layer w10: U1.25@1194.09,455.51 1140.51,455.51 1110,425 1110,225 1105,220 1105,195 1150,150 1795,150 1800,155 v1(1850,155) ; v1(3280,1315) 3315,1350 P1.33@3500,1350
R\S\T\: P1.35 U1.23 U6.5 | length 3426
  Top Layer w10: v1(1420,1060) 1420,895 1430,885 1430,815 1440,805 v1(1440,690)
  Bottom Layer w10: U1.23@1194.09,392.52 1247.52,392.52 1255,400 1255,505 v1(1440,690) ; v1(1420,1060) 1530,1060 1570,1100 2000,1100 2080,1180 2460,1180 2480,1200 2640,1200 2714.41,1274.41 U6.5@2810.24,1274.41 2857.59,1274.41 2885,1247 2885,1195 2905,1175 3015,1175 3070,1120 3205,1120 3230,1145 3230,1445 3335,1550 P1.35@3500,1550
RAMC\E\: U3.27 U7.4 | length 1114.9
  Top Layer w10: v1(1990,370) 1995,365 1995,295 2020,270 2115,270 2205,180 2320,180 2355,215 2627.53,215 2680,267.47 v1(2680,270)
  Bottom Layer w10: U7.4@1953.15,337.4 1953.15,365.15 1958,370 v1(1990,370) ; v1(2680,270) 2680,285 2755,360 2772,360 2780.91,351.09 U3.27@2780.91,301.97
USER: R10.1 SW43.3 SW43.4 U10.36 | length 5225.2
  Top Layer w10: v1(195,1985) 195,1280 245,1230 245,955 280,920 280,415 340,355 v1(644.49,355) ; v1(2890,1886.42) SW43.3@2943.5,1886.42
  Bottom Layer w10: v1(195,1985) 1060,1985 1135,1910 2866.42,1910 v1(2890,1886.42) ; v1(644.49,355) U10.36@644.49,294.09 644.49,240.51 660,225 795,225 805,215 805,135 820,120 R10.1@874.57,120
VCC: C1.2 C2.2 C3.2 C4.2 C5.2 C6.2 C7.2 C8.2 C9.2 C10.2 C11.2 C20.2 C23.1 C24.1 D2.1 D3.1 R1.2 R3.2 R4.1 R5.1 R9.2 R10.2 R19.2 R20.2 R21.2 R22.2 R23.2 R24.2 U1.6 U2.8 U3.7 U4.5 U5.14 U6.1 U6.4 U6.10 U6.13 U6.14 U7.5 U8.20 U9.14 U10.24 U11.14 U12.3 | length 3330.5
  Top Layer w10: v1(1635,550) 1635,574 1636,575 D3.1@1667.52,575 ; v1(1637,260) 1664.04,260 1667.52,256.52 D2.1@1667.52,225
  Bottom Layer w10: R21.2@585.43,120 585.43,155 ; R22.2@585.43,190 585.43,155 ; R23.2@765.43,120 765.43,155 ; R24.2@765.43,190 765.43,155 ; v1(1637,260) 1669.57,260 C1.2@1669.57,295 ; 585.43,155 v1(630,155) 765.43,155
  Bottom Layer w12: U2.8@2240.16,813.78 v1(2240.16,869.84) ; v1(2880,730) v1@2880,739 ; v1@2881,740 2889.17,748.17 U3.7@2889.17,798.03
  Bottom Layer w14: U11.14@989.76,1376.77 v1(1041.77,1376.77) ; v1(1556.77,1223.23) U9.14@1610.24,1223.23 ; v1(2125,1410) 2125,1390 2138.23,1376.77 U5.14@2189.76,1376.77 ; U6.10@2589.76,1274.41 2679.41,1274.41 2705,1300 U6.4@2810.24,1300 2870,1300 2890,1320 2890,1350 ; U6.13@2589.76,1351.18 2645,1351.18 v1(2645,1365) 2645,1376.77 U6.14@2589.76,1376.77 ; U6.1@2810.24,1376.77 2863.23,1376.77 2890,1350 ; U4.5@2955.51,1350 2890,1350
  Bottom Layer w20: C10.2@225.43,190 225.43,230.43 230,235 v1(334.57,235) R19.2@334.57,190 R20.2@334.57,120 ; U8.20@559.57,1248.5 C8.2@559.57,1305 R3.2@559.57,1375 R1.2@559.57,1445 C20.2@559.57,1515 v1(559.57,1554.57) ; v1(745.98,675.98) U10.24@805.91,675.98 ; v1(945.43,80.43) R10.2@945.43,120 R9.2@945.43,190 ; v1(1149.57,1410.43) C11.2@1149.57,1460 ; R5.1@1175,190.43 v1(1175,229) ; R4.1@1395.43,190 v1(1445,190) ; v1(1620.43,1420.43) C9.2@1620.43,1460 ; v1(1635,550) U1.6@1705.91,550 ; v1(1910,300) U7.5@1953.15,300 C7.2@2025,300 ; v1(2025.43,720.43) C2.2@2025.43,760 ; v1(2349.57,1415.43) C5.2@2349.57,1460 ; C3.2@2665,775.43 v1(2665,820) ; C6.2@2820.43,1460 v1(2820.43,1509.57) ; U4.5@2955.51,1350 v1(3015,1350) C4.2@3015,1514.57
  Bottom Layer w50: C23.1@240,1500.63 240,1583.7 ; C24.1@240,1774.88 240,1583.7 ; 317,1583.7 240,1583.7
  other v1: 240,1650 240,1680 240,1710
W\A\I\T\: P1.37 R4.2 U1.21 | length 3642.8
  Top Layer w10: v1@1395,1420 1410,1405 1410,1260 1470,1200 1470,875 1500,845 v1(1500,675) ; v1(2865,1640) v1(2960,1640)
  Bottom Layer w10: R4.2@1324.02,190.55 U1.21@1324.02,294.09 1324.02,499.02 v1(1500,675) ; v1@1395,1435 1460,1500 1460,1560 1485,1585 2790,1585 2845,1640 v1(2865,1640) ; v1(2960,1640) 2960,1685 3025,1750 P1.37@3500,1750
  other v1: 1395,1425
W\R\: P1.39 U1.19 U2.7 U3.6 U10.34 | length 4847.7
  Top Layer w10: v1(740,294.09) 794.09,240 940,240 973,273 1344.01,273 v1(1387.01,230) ; v1(2080,710) v1(2255,710) 2255,725.94 v1(2220.47,760.47) ; v1(2745,915) 2745,1165 2715,1195 2715,1330 2810,1425 3035,1425 3090,1480 3090,1835 v1(3205,1950)
  Bottom Layer w10: U10.34@707.48,294.09 v1(740,294.09) ; v1(1387.01,230) U1.19@1387.01,294.09 1387.01,462.01 1785,860 2055,860 2080,835 v1(2080,710) ; v1(2220.47,760.47) U2.7@2220.47,813.78 ; v1(2255,710) 2305,660 2460,660 2520,720 2520,885 2550,915 2810,915 2867.52,857.48 U3.6@2867.52,798.03 ; v1(3205,1950) P1.39@3500,1950
pads on no net: J1.3 J1.4 J1.5 J1.6 P1.11 U1.11 U1.17 U1.33 U1.39 U2.6 U2.9 U4.4 U4.8 U4.9 U4.13 U10.12 U10.17 U10.22 U10.39 U11.6 U11.8

## Polygon pours and split planes (outlines as drawn)
VCC on Power Plane (split plane): 3329.9,2150 3330.29,2146.08 3331.43,2142.31 3333.29,2138.83 3335.79,2135.79 3338.83,2133.29 3342.31,2131.43 3346.08,2130.29 3350,2129.9 3601.68,2129.9 3629.9,2101.68 3629.9,98.32 3601.68,70.1 3350,70.1 3346.08,69.71 3342.31,68.57 3338.83,66.71 3335.79,64.21 3333.29,61.17 3331.43,57.69 3330.29,53.92 3329.9,50 3329.9,20.1 20.1,20.1 20.1,2179.9 3329.9,2179.9
GND on Ground Plane (split plane): 3329.9,2150 3330.29,2146.08 3331.43,2142.31 3333.29,2138.83 3335.79,2135.79 3338.83,2133.29 3342.31,2131.43 3346.08,2130.29 3350,2129.9 3601.68,2129.9 3629.9,2101.68 3629.9,98.32 3601.68,70.1 3350,70.1 3346.08,69.71 3342.31,68.57 3338.83,66.71 3335.79,64.21 3333.29,61.17 3331.43,57.69 3330.29,53.92 3329.9,50 3329.9,20.1 20.1,20.1 20.1,2179.9 3329.9,2179.9

## Other copper
Top Layer:
  text ".Layer_Name" at -3.78,-602.05 h100
  text "Minna V0.1" at 0,-800 h100
Bottom Layer:
  text ".Layer_Name" at -3.78,-602.05 h100
  text "Minna V0.1" at 0,-800 h100
Power Plane (plane layer: these items are gaps in the copper):
  text ".Layer_Name" at -3.78,-602.05 h100
  text "Minna V0.1" at 0,-800 h100
Ground Plane (plane layer: these items are gaps in the copper):
  text ".Layer_Name" at -3.78,-602.05 h100
  text "Minna V0.1" at 0,-800 h100

## Silkscreen, mask and mechanical layers (free items; w line width, h text height)
Top Overlay:
  text ".Layer_Name" at -3.78,-602.05 h100
  text "Minna V0.1" at 0,-800 h100
Bottom Overlay:
  text ".Layer_Name" at -3.78,-602.05 h100
  text "Minna V0.1" at 0,-800 h100
Bottom Paste:
  text ".Layer_Name" at -3.78,-602.05 h100
  text "Minna V0.1" at 0,-800 h100
Top Solder:
  text ".Layer_Name" at 0,-600 h100
  text "Minna V0.1" at 0,-800 h100
Bottom Solder:
  text ".Layer_Name" at 0,-600 h100
  text "Minna V0.1" at 0,-800 h100
Drill Guide:
  text ".Layer_Name" at -3.78,-602.05 h100
  text "Minna V0.1" at 0,-800 h100
Title Block:
  lines w5: -450,-574 -250,-574 ; -450,1298 -250,1298 ; -450,3178 -250,3178 ; 1926,-2450 1926,-2250 ; 1926,4850 1926,5050 ; 4298,-2450 4298,-2250 ; 4298,4850 4298,5050 ; 4350,-1950 8850,-1950 ; 4350,-1650 8850,-1650 ; 4350,-1350 5850,-1350 ; 5850,-2250 5850,-1650 5850,-1050 ; 6675,-2450 6675,-2250 ; 6675,4850 6675,5050 ; 7950,-2250 7950,-1950 ; 8850,-574 9050,-574 ; 8850,1298 9050,1298 ; 8850,3178 9050,3178 ; 4350,-2250 2950,-2250 2950,-1050 4350,-1050 ; 4350,-2250 8850,-2250 ; 4350,-2250 4350,-1050 ; 4350,-1050 5850,-1050 ; 5850,-1050 8850,-1050 8850,-2250 ; 8850,-2250 -250,-2250 -250,4850 8850,4850 8850,-2250 ; -450,-2450 -450,5050 9050,5050 9050,-2450 -450,-2450
  lines w9: 4060,4229.5 8690,4229.5 ; 4060,4390.2 8690,4390.2 ; 4000,2702 ccw(c4052,2702) 4052,2650 8698,2650 ccw(c8698,2702) 8750,2702 8750,4698 ccw(c8698,4698) 8698,4750 4052,4750 ccw(c4052,4698) 4000,4698 4000,2702
  text "1" at 722.34,4915 h70
  text "2" at 3080.35,4915 h70
  text "3" at 5457,4915 h70
  text "4" at 7832.35,4915 h70
  text "Layer Stack Up Detail for: Minna_V01.PcbDoc" at 4060,4490.6 h105
  text "Layer" at 4060,4330.2 h37
  text "Gerber" at 5057.38,4330.2 h37
  text "Copper" at 5549.59,4330.2 h37
  text "Dielectric" at 6102.21,4330.2 h37
  text "Dielectric" at 6680.73,4330.2 h37
  text "Dielectric" at 7418.2,4330.2 h37
  text "Dielectric" at 7996.71,4330.2 h37
  text "Name" at 4060,4256.2 h37
  text "Document" at 5057.38,4256.2 h37
  text "Thickness" at 5549.59,4256.2 h37
  text "Height" at 6102.21,4256.2 h37
  text "Material" at 6680.73,4256.2 h37
  text "Constant" at 7418.2,4256.2 h37
  text "Type" at 7996.71,4256.2 h37
  text "Top Solder Mask" at 4060,4110.42 h52
  text "(.GTS)" at 5057.38,4110.42 h52
  text "0.4mil" at 6102.21,4110.42 h52
  text "Solder Resist" at 6680.73,4110.42 h52
  text "3.50" at 7418.2,4110.42 h52
  text "A" at -375,4025 h70
  text "A" at 8920,4025 h70
  text "Top Layer" at 4060,3881.25 h52
  text "(.GTL)" at 5057.38,3881.25 h52
  text "2.1mil" at 5549.59,3881.25 h52
  text "14mil" at 6102.21,3766.67 h52
  text "FR-4" at 6680.73,3766.67 h52
  text "4.20" at 7418.2,3766.67 h52
  text "Core" at 7996.71,3766.67 h52
  text "Power Plane" at 4060,3652.08 h52
  text "(.GP1)" at 5057.38,3652.08 h52
  text "0.7mil" at 5549.59,3652.08 h52
  text "28mil" at 6102.21,3537.5 h52
  text "FR-4" at 6680.73,3537.5 h52
  text "4.20" at 7418.2,3537.5 h52
  text "PrePreg" at 7996.71,3537.5 h52
  text "Ground Plane" at 4060,3422.92 h52
  text "(.GP2)" at 5057.38,3422.92 h52
  text "0.7mil" at 5549.59,3422.92 h52
  text "14mil" at 6102.21,3308.33 h52
  text "FR-4" at 6680.73,3308.33 h52
  text "4.20" at 7418.2,3308.33 h52
  text "Core" at 7996.71,3308.33 h52
  text "Bottom Layer" at 4060,3193.75 h52
  text "(.GBL)" at 5057.38,3193.75 h52
  text "2.1mil" at 5549.59,3193.75 h52
  text "Bottom Solder Mask" at 4060,2964.58 h52
  text "(.GBS)" at 5057.38,2964.58 h52
  text "0.4mil" at 6102.21,2964.58 h52
  text "Solder Resist" at 6680.73,2964.58 h52
  text "3.50" at 7418.2,2964.58 h52
  text "ALL HOLES INDICATE FINISHED SIZE" at 4008,2508 h60
  text "MATERIAL ->" at 4008,2208 h60
  text "B" at -375,2149 h70
  text "B" at 8920,2149 h70
  text "MATERIAL: EPOXY FIBERGLASS FR4 TG170 OR EQUIVALENT," at 4108,2108 h60
  text "LAMINATE AND PREPREG (B-STAGE) TO BE IN ACCORDANCE WITH IPC-4101/24 OR IPC-4101/26." at 4108,2008 h60
  text "MATERIAL MUST MEET UL 94V-0 FLAMABILITY RATING." at 4108,1908 h60
  text "ACCEPTABILITY REQUIREMENTS PER IPC-A-600E." at 4108,1808 h60
  text "0.062\"" at 6208,1808 h60
  text "+/- 0.007\" FINISHED THICKNESS." at 6508,1808 h60
  text "THIS IS A 4 LAYER BOARD." at 4108,1708 h60
  text "FINISH ->" at 4008,1558 h60
  text "FINISHED COPPER THICKNESS TO BE" at 4108,1408 h60
  text "0.5" at 5658,1408 h60
  text "oz. EXTERNAL LAYERS," at 5808,1408 h60
  text "0.5" at 6808,1408 h60
  text "oz. INTERNAL LAYERS (MULTI-LAYERED)" at 6958,1408 h60
  text "SOLDER MASK OVER BARE COPPER, BOTH SIDES, L.P.I., BLACK IN COLOR. 0.002\" MAX THICKNESS" at 4108,1308 h60
  text "ALL EXPOSED CONDUCTIVE PATTERN AREAS NOT COVERED WITH SOLDERMASK OR OTHER PLATING" at 4108,1208 h60
  text "SHALL BE IMMERSION GOLD FINISH." at 4108,1108 h60
  text "SILKSCREEN SHALL BE WHITE, PERMANENT, ORGANIC, NON-CONDUCTIVE INK." at 4108,1008 h60
  text "THERE SHALL BE NO SILKSCREEN ON ANY SOLDERABLE COMPONENT PAD." at 4108,908 h60
  text "UL LOGO, MANUFACTURER'S IDENTIFICATION AND DATE CODE LETTER SHALL BE RENDERED IN ETCH ON" at 4108,808 h60
  text "THE TOP SIDE OF THE BOARD" at 4108,708 h60
  text "TOLERANCES ->" at 4008,558 h60
  text "WARP OR TWIST OF BOARD SHALL NOT EXCEED 1%." at 4108,408 h60
  text "CONDUCTOR WIDTHS AND SPACING SHALL BE WITHIN +/- 0.001\" OF GERBER DATA." at 4108,308 h60
  text "C" at -375,273 h70
  text "C" at 8920,273 h70
  text "HOLE LOCATION +/- 0.003\". MAXIMUM LAYER TO LAYER MIS-REGISTRAION SHALL BE 0.005\"" at 4108,208 h60
  text "HOLE DIAMETER TOLERANCE IS +/- 0.003\" AFTER PLATING" at 4108,108 h60
  text "REMOVE ALL BURRS AND BREAK SHARP EDGES 0.015\" MAXIMUM." at 4108,8 h60
  text "SURFACE MOUNT PAD PLATING MUST BE FLAT TO A MAXIMUM OF 0.08 (0.003\") ABOVE BOARD SURFACE." at 4108,-92 h60
  text "MINIMUM COPPER PLATING 0.001\" THICK FOR PLATED THROUGH HOLES." at 4108,-192 h60
  text "ENGINEER:" at 4400,-1150 h45
  text "TITLE:" at 5900,-1150 h45
  text "CHRIS HETTRICK" at 4450,-1270 h70
  text "SMARI" at 3050,-1300 h150
  text "PCB DESIGNER:" at 4400,-1445 h45
  text "Minna_V01" at 6100,-1500 h150
  text "103-3061 E KENT AVE N" at 3010,-1570 h70
  text "CHRIS HETTRICK" at 4450,-1570 h70
  text "D" at -375,-1599 h70
  text "D" at 8920,-1599 h70
  text "VANCOUVER, BC" at 3010,-1710 h70
  text "DATE:" at 4400,-1750 h45
  text "LAYER NAME:" at 5900,-1750 h45
  text "V5S 4P5" at 3010,-1850 h70
  text ".PRINT_DATE" at 4450,-1870 h70
  text "FILE NAME:" at 4400,-2050 h45
  text "PART NO.:" at 5900,-2050 h45
  text "REV.:" at 8000,-2050 h45
  text ".PCB_FILE_NAME_NO_PATH" at 4450,-2170 h70
  text "N/A" at 6350,-2170 h80
  text "0.1" at 8190,-2170 h70
  text "1" at 722.34,-2385 h70
  text "2" at 3080.35,-2385 h70
  text "3" at 5457,-2385 h70
  text "4" at 7832.35,-2385 h70
Component Body:
  text ".Layer_Name" at -3.78,-602.05 h100
  text "Minna V0.1" at 0,-800 h100
Assembly Top:
  text "smari" at 0,-175 h80
  text "Minna V0.1  Dec 27, 2011" at 0,-325 h80
  text "Not To Scale" at 0,-475 h80
Assembly Bottom:
  text "smari" at 2650,-175 h80
  text "Minna V0.1  Dec 27, 2011" at 2650,-325 h80
  text "Not To Scale" at 2650,-475 h80
Courtyard Top:
  text ".Layer_Name" at -3.78,-602.05 h100
  text "Minna V0.1" at 0,-800 h100
Courtyard Bottom:
  text ".Layer_Name" at -3.78,-602.05 h100
  text "Minna V0.1" at 0,-800 h100
Drill Drawing:
  the board outline again, w7.87
  text ".Layer_Name" at -3.78,-602.05 h100
  text ".Layer_Name" at -3.78,-602.05 h100
  text "Minna V0.1" at 0,-800 h100

## Dimensions
0,2200 to 3650,2110 on Drill Drawing
0,0 to 0,2200 on Drill Drawing
0,2200 to 3350,2200 on Drill Drawing

## Text inside footprints (layer, text, board x,y; h text height)
P1: Bottom Overlay "40" at 3320,2025 h48; Bottom Overlay "21" at 3320,125 h48; Top Overlay "20" at 3240,200 h48; Top Overlay "1" at 3305,1950 h48